# EAGLE board Rear_brake_lamp_v3 (EAGLE 7.3.0)
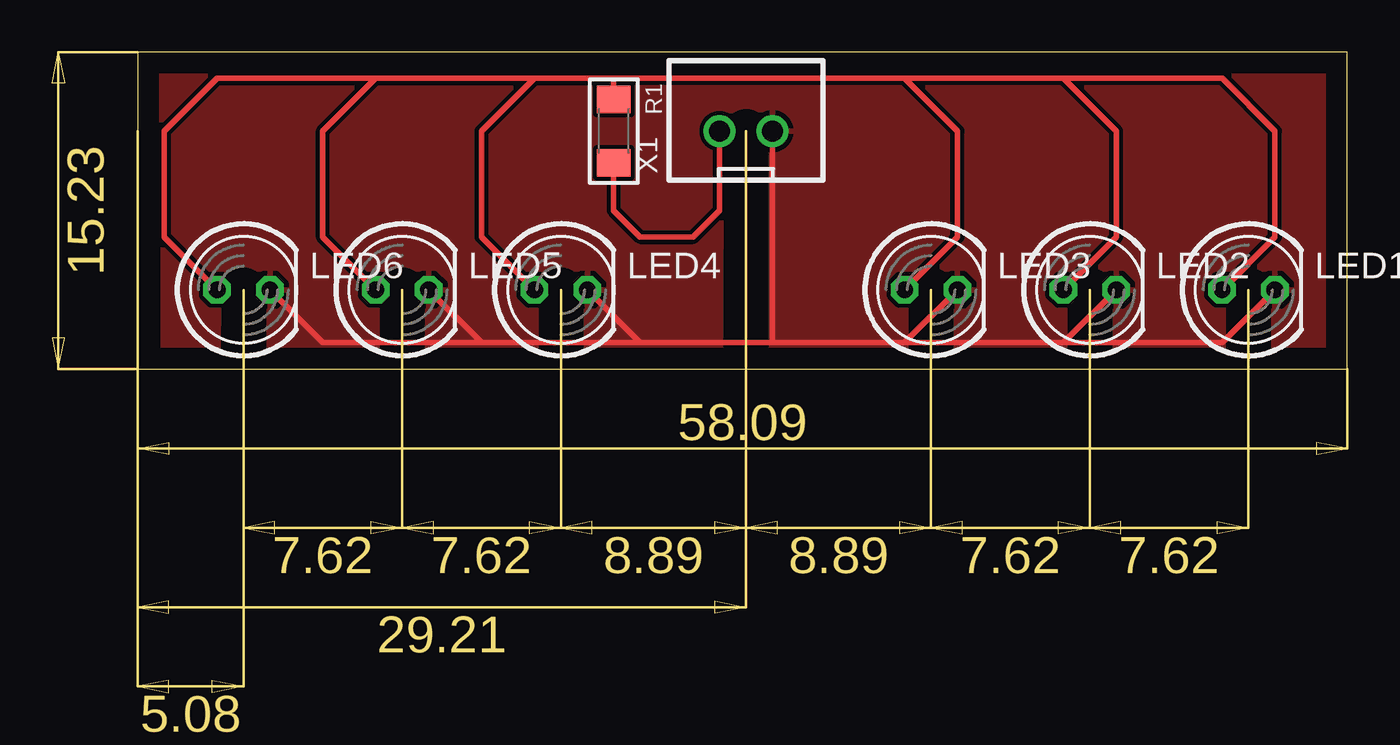
[diagram p0: board, top side]

Size 58.09 x 15.23 mm. Coordinates in mm from the lower left corner, seen from the top.
Outline: 0,0 58.09,0 58.09,15.23 0,15.23 0,0
Copper layers (1*16): Top 0.035mm / dielectric 1.5mm / Bottom 0.035mm
Design rules "default": minimum track width 10mil, minimum drill 24mil, track to track 8mil, track to pad 8mil, pad to pad 8mil, via to via 8mil, smd to smd 8mil, copper to edge 40mil, drill to drill 8mil, minimum pad ring 10mil, minimum via ring 8mil, stop-mask expansion 4mil, vias tented up to drill 0mil, thermal gap 10mil

## Footprints (pad centres in the part's own frame; a part is rotated, then mirrored left to right if it is on the bottom)
LED5MM = drill 0.813 octagon: A -1.27,0; K 1.27,0
R1206 = smd 1.3 x 1.6: 1 -1.524,0; 2 1.524,0
JST-XH-02-PACKAGE-ROUND-PAD = drill 1.016: 1 -1.27,0; 2 1.27,0

## Placement (x,y rotation side)
LED1  1.78 V  [LED5MM]  53.34,3.81 0 top
LED2  1.78 V  [LED5MM]  45.72,3.81 0 top
LED3  1.78 V  [LED5MM]  38.1,3.81 0 top
LED4  1.78 V  [LED5MM]  20.32,3.81 0 top
LED5  1.78 V  [LED5MM]  12.7,3.81 0 top
LED6  1.78 V  [LED5MM]  5.08,3.81 0 top
R1  120  [R1206]  22.86,11.43 270 top
X1  JST-XH-02-PIN-ROUND-PAD  [JST-XH-02-PACKAGE-ROUND-PAD]  29.21,11.43 0 top

## Library data of the parts
LED1-LED6 = led; COLOR: Red; CURRENT: 0.32 mA
R1 = rc-master-smd
X1 = Rembrandt Electronics - JST XH Connectors v1-0

## Nets
API_BRAKE: LED1.A LED2.A LED3.A LED4.A LED5.A LED6.A R1.1
GND: LED1.K LED2.K LED3.K LED4.K LED5.K LED6.K X1.2
N$7: R1.2 X1.1

## Tracks (layer width: path | path; a pad name or v marks a point on that pad's centre or on a via)
API_BRAKE
  Top 0.254: LED4.A 16.51,6.35 16.51,11.43 19.05,13.97 | 19.05,13.97 22.86,13.97 | 22.86,13.97 R1.1 | LED5.A 8.89,6.35 8.89,11.43 11.43,13.97 | 11.43,13.97 19.05,13.97 | LED6.A 1.27,6.35 1.27,11.43 3.81,13.97 11.43,13.97 | LED1.A 54.61,6.35 54.61,11.43 52.07,13.97 44.45,13.97 | 44.45,13.97 36.83,13.97 | 36.83,13.97 22.86,13.97 | LED2.A 46.99,6.35 46.99,11.43 44.45,13.97 | LED3.A 39.37,6.35 39.37,11.43 36.83,13.97
GND
  Top 0.254: X1.2 30.48,1.27 | 30.48,1.27 24.13,1.27 | 24.13,1.27 16.51,1.27 | 16.51,1.27 8.89,1.27 LED6.K | LED5.K 16.51,1.27 | LED4.K 24.13,1.27 | LED1.K 52.07,1.27 44.45,1.27 | 44.45,1.27 36.83,1.27 | 36.83,1.27 30.48,1.27 | LED2.K 44.45,1.27 | LED3.K 36.83,1.27
  pour Top: 0,15.24 58.42,15.24 58.42,0 0,0
N$7
  Top 0.254: X1.1 27.94,7.62 26.67,6.35 24.13,6.35 22.86,7.62 R1.2